# Altium PCB AMC_Single_uBACKPLANE.PcbDoc (part 1 of 2)
Units mm, origin at the board's own origin, x right, y up, seen from the top; angles counter-clockwise.
Board outline 54.63 x 82.6 mm, 4 copper layers (TOP, GND, PWR, BTM), stack 1.618 mm thick; 29 components, 100 nets, 344 pads, 209 vias.
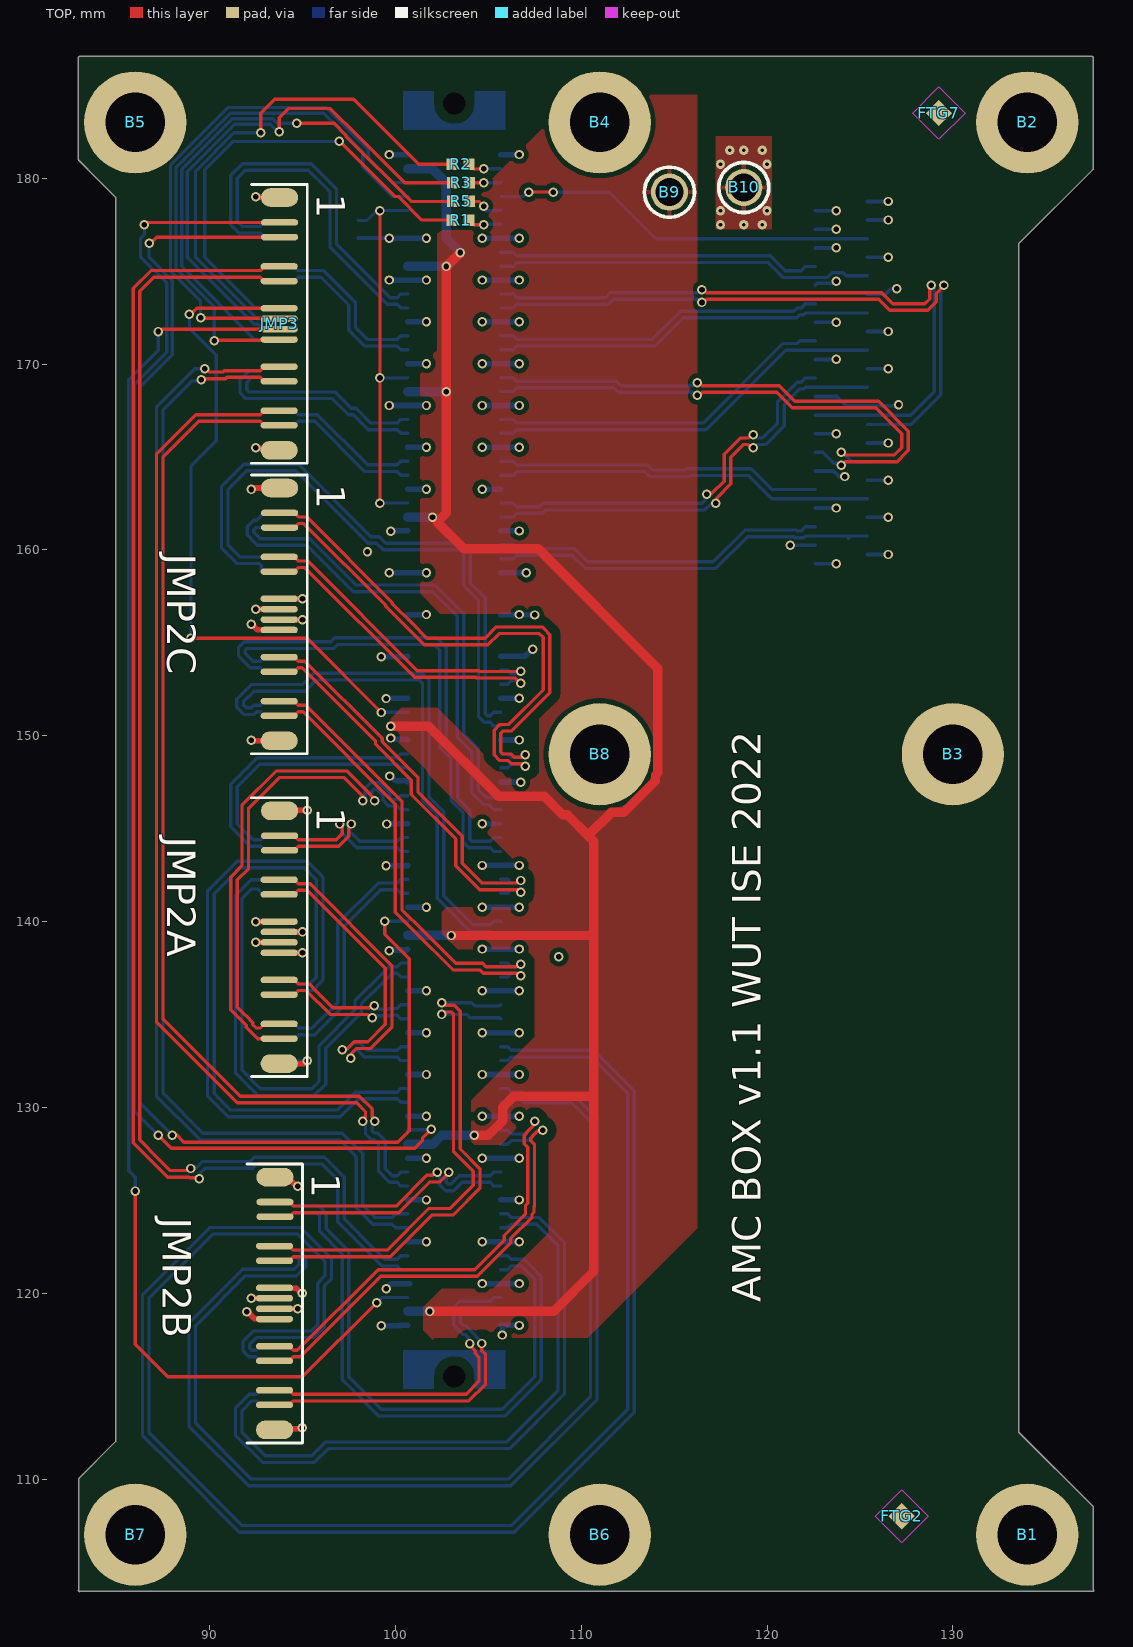
[diagram p0: TOP view]
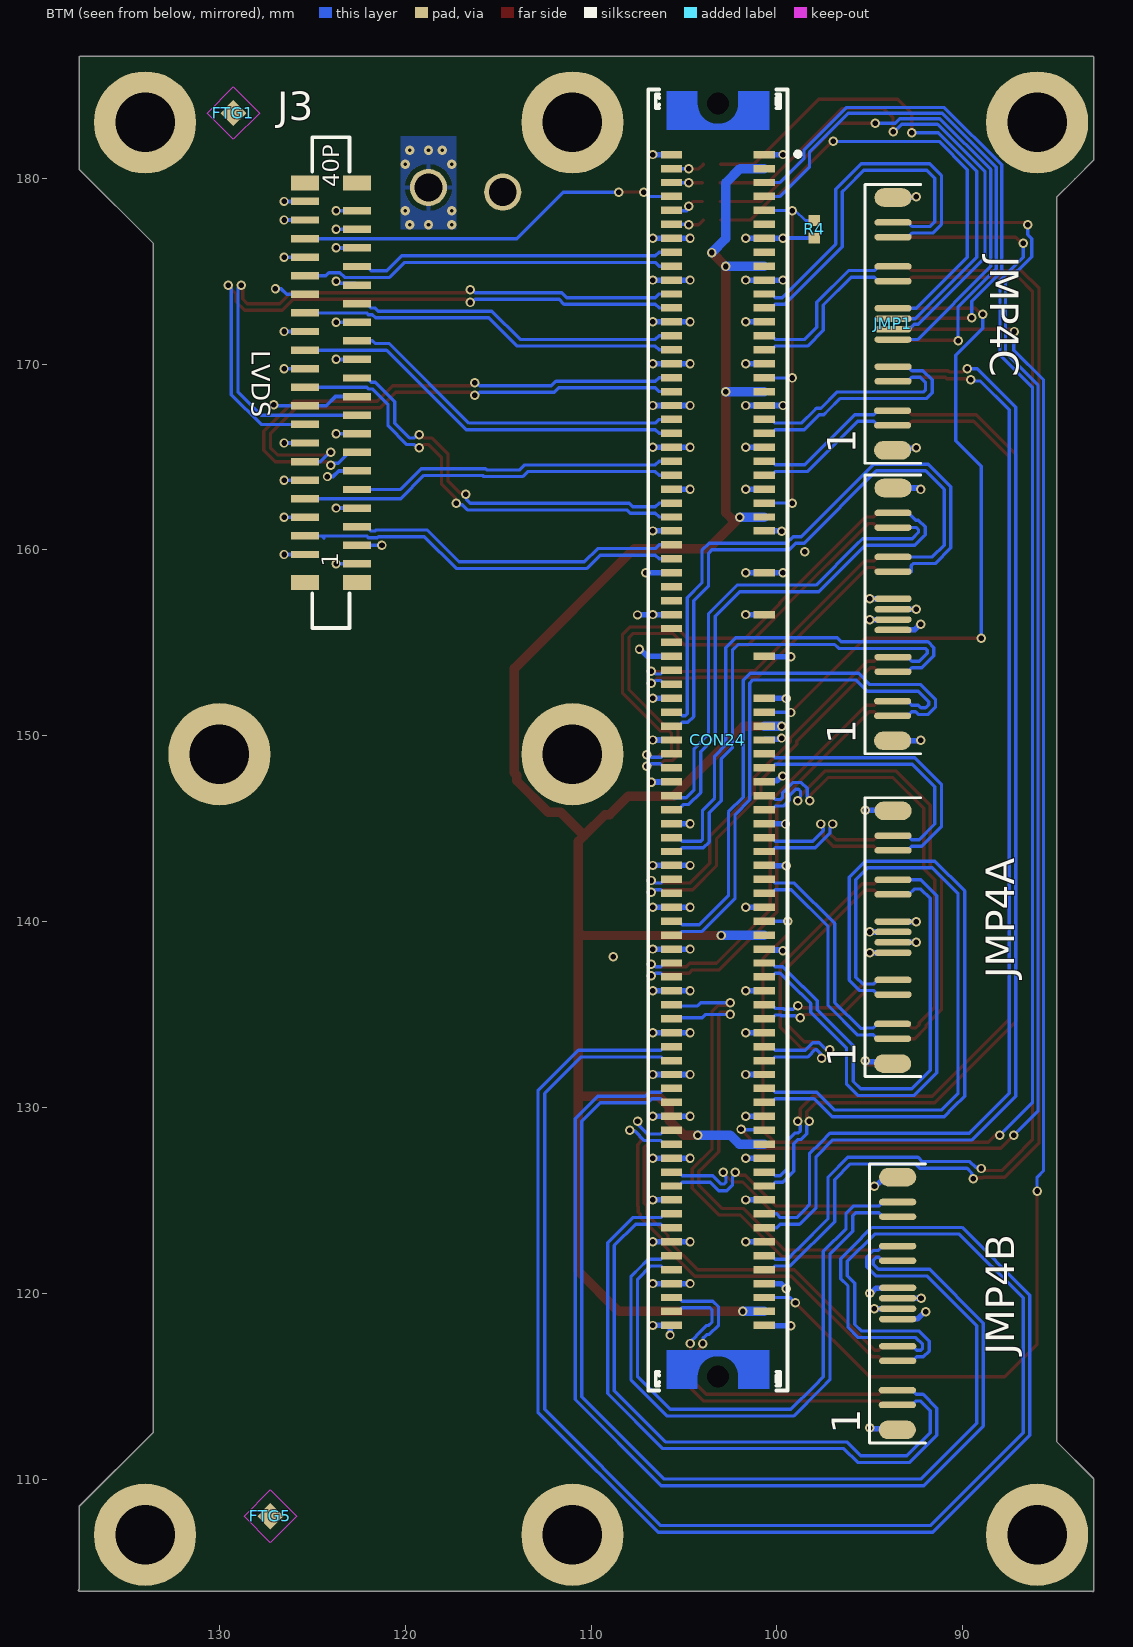
[diagram p1: BTM view, seen from below]
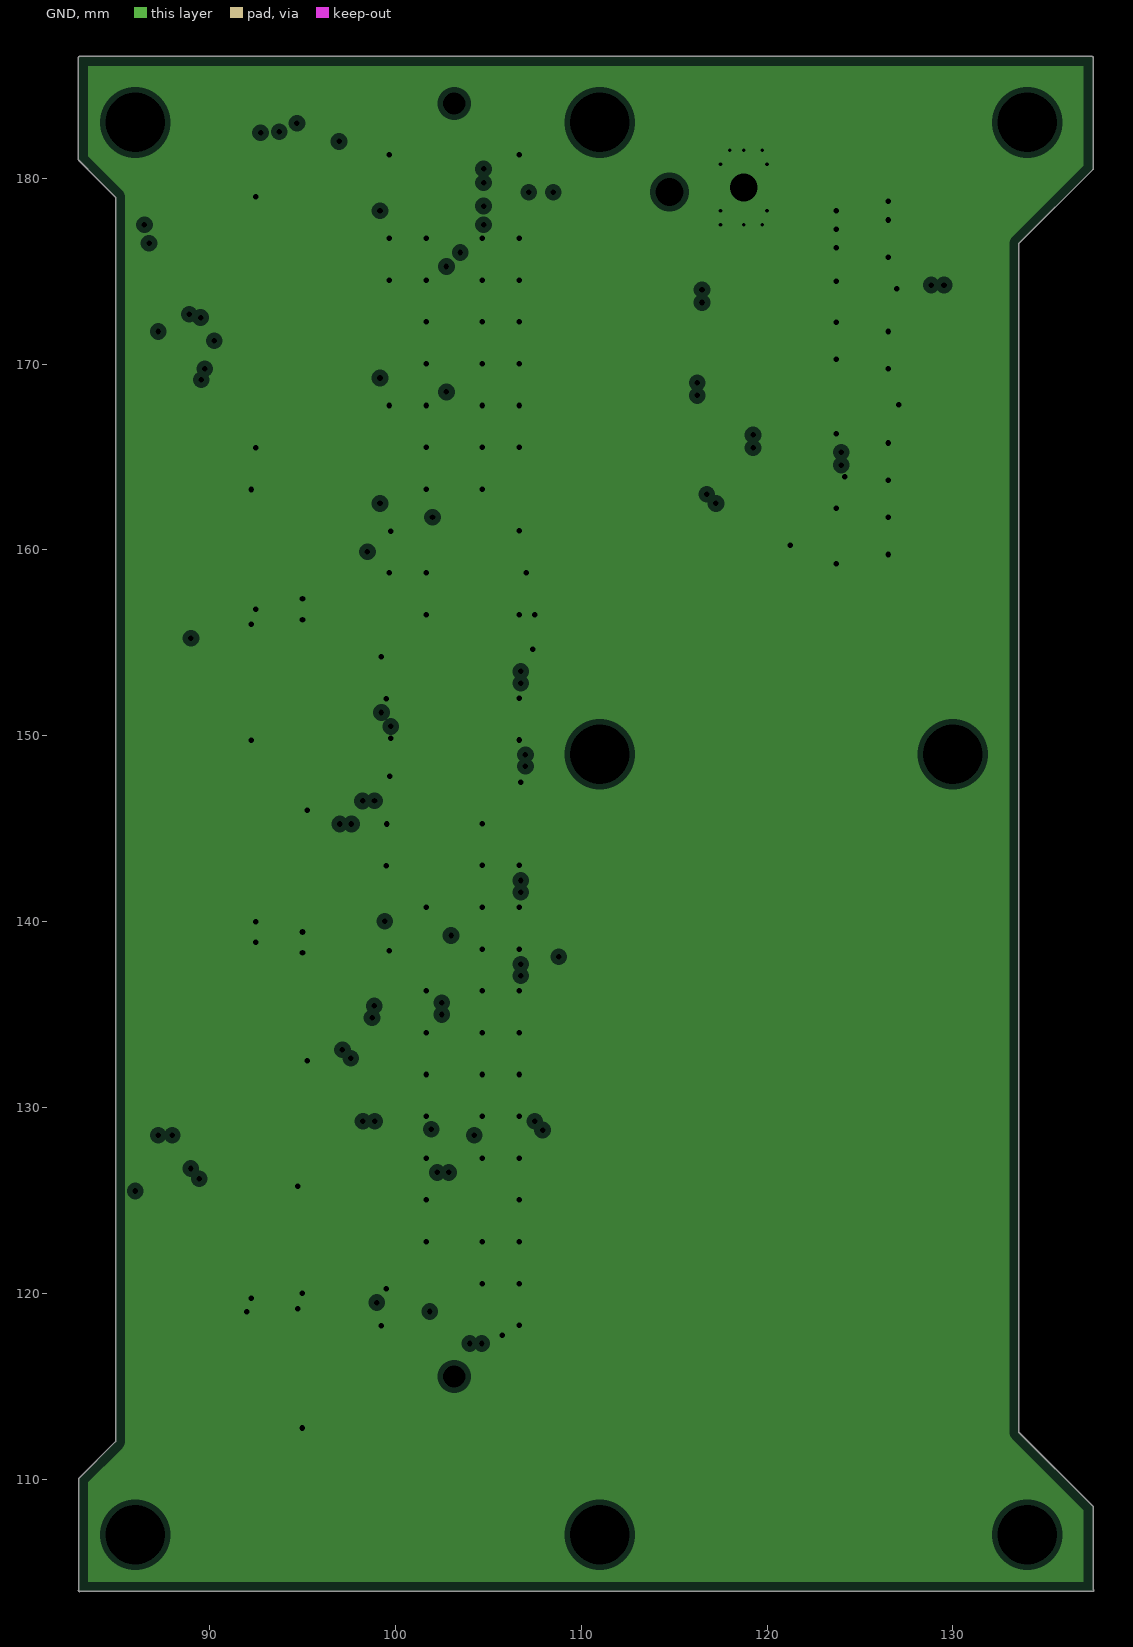
[diagram p2: GND, clearances drawn from the general rule]
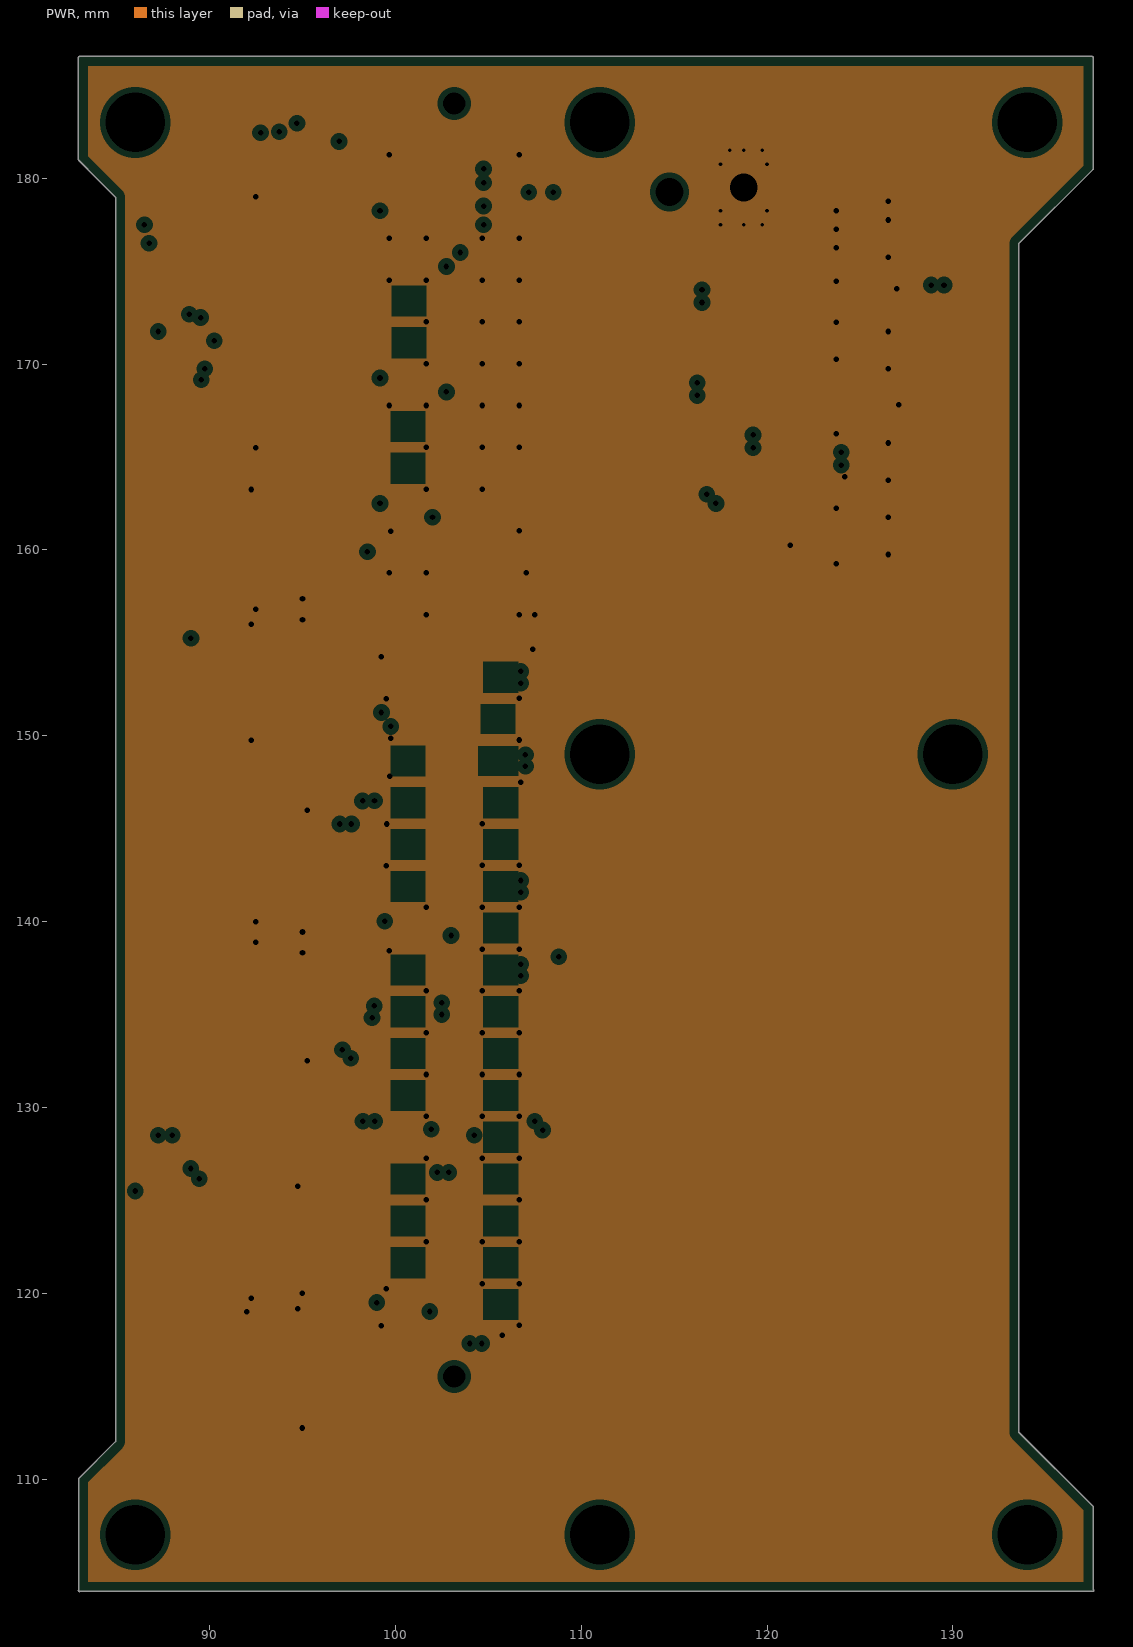
[diagram p3: PWR, clearances drawn from the general rule]
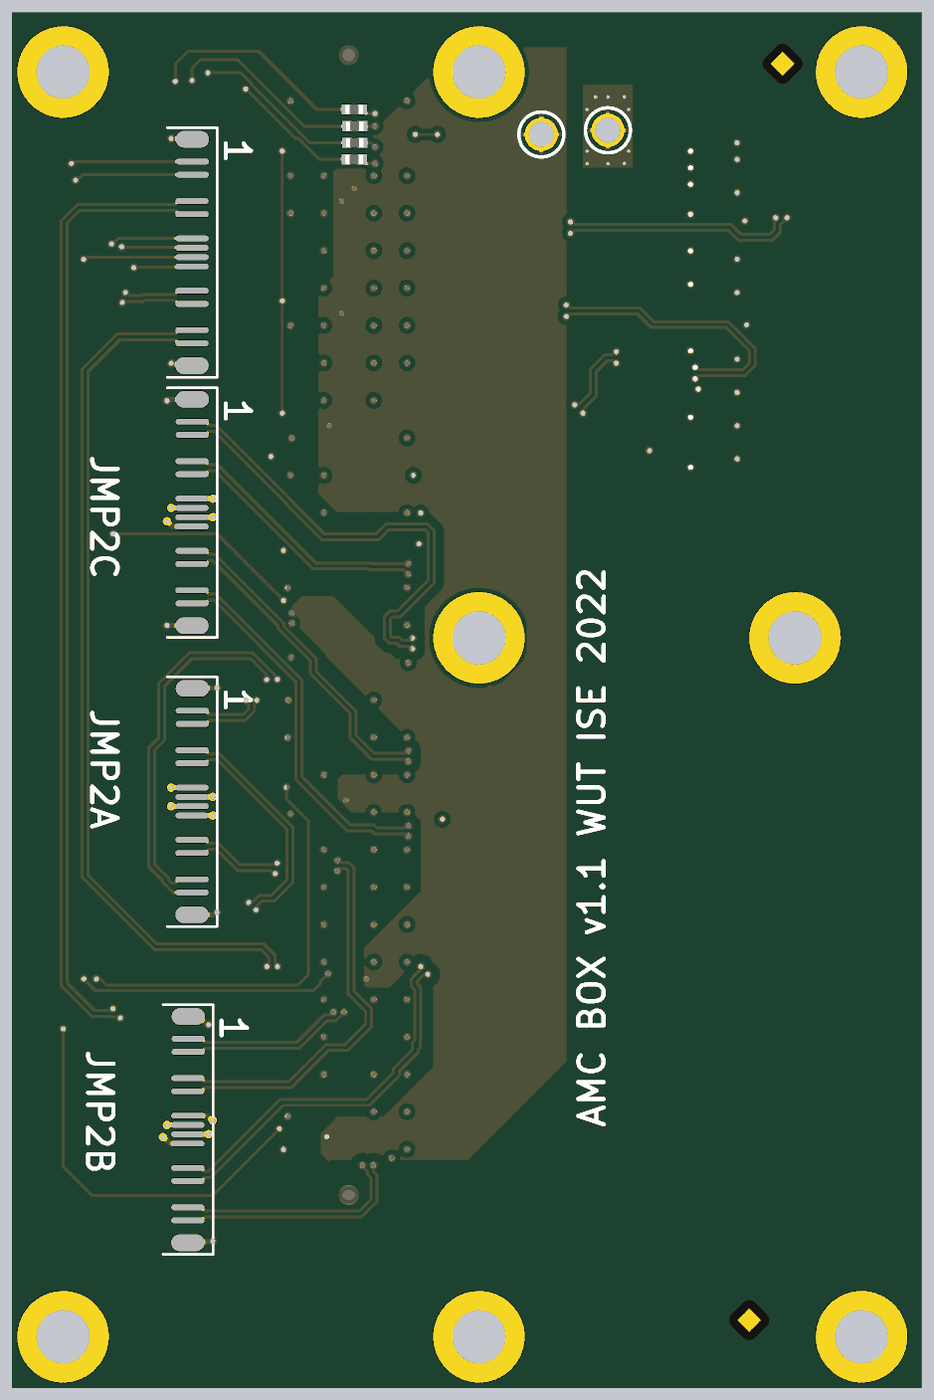
[diagram p5: 3D render of the assembled board from above, using the file's embedded part models]

## Layer stack, top to bottom
Top Solder: solder mask 0.012, Solder Resist, Dk 3.5
TOP: signal copper 0.053
Dielectric1: core 0.18, FR4 IT180-A / S1000-2 0.135mm 18u/18u, Dk 4.5
GND: plane copper 0.036, net GND
Dielectric2: prepreg 1.08, FR-4, Dk 4.5
PWR: plane copper 0.036, net GND
Dielectric3: core 0.18, FR4 IT180-A / S1000-2 0.135mm 18u/18u, Dk 4.5
BTM: signal copper 0.053
Bottom Solder: solder mask 0.012, Solder Resist, Dk 3.5

## Board outline
83.032,103.961 cw(c83,104) 82.961,104.032 82.961,110.011 cw(c83.011,110.011) 82.976,110.047 82.975,110.047 84.95,112.021 84.95,178.979 83.965,179.964 cw(c84,180) 83.964,179.964 cw(c84,180) 83.964,179.965 83.965,179.964 82.964,180.964 82.965,180.964 cw(c83,181) 82.95,181 82.95,186.5 cw(c83,186.5) 83,186.55 137.5,186.55 cw(c137.5,186.5) 137.55,186.5 137.55,180.5 cw(c137.5,180.5) 137.535,180.464 137.536,180.464 133.55,176.479 133.55,112.521 137.536,108.536 137.535,108.536 cw(c137.5,108.5) 137.55,108.5 137.55,104.064 137.568,104.047 137.567,104.047 cw(c137.532,104.011) 137.582,104.011 cw(c137.532,104.011) 137.532,103.961

## Design rules (kind name [scope] priority, off if disabled: settings)
AcuteAngle [All] p1: minimum=5.00000000000000E+0001 checktracksonly=FALSE
Clearance Pads_v_pads [InPadClass('All pads') vs InPadClass('All pads')] p1: gap=0.025 ignorepadtopadclearanceinfootprint=FALSE except(0: Arc-Hole Track-Hole SMDPad-Hole THPad-Hole Via-Hole Fill-Hole Poly-Hole Region-Hole Text-Hole)
Clearance poly_vs_impedance [InNetClass('SE') or InNetClass('DE') vs inpoly] p2: gap=0.5 ignorepadtopadclearanceinfootprint=FALSE except(0: Arc-Hole Track-Hole SMDPad-Hole THPad-Hole Via-Hole Fill-Hole Poly-Hole Region-Hole Text-Hole)
Clearance DE&SE_in_room [(InNetClass('DE') OR InNetClass('SE')) and iswire and (WithinRoom('QSFPA') OR WithinRoom('QSFPB') OR WithinRoom('SFP0_AFC') OR WithinRoom('SFP0_ACC') OR WithinRoom('SFP1_AFC') OR WithinRoom('SFP1_ACC') OR WithinRoom('CLK') OR WithinRoom('ETH_CON') OR WithinRoom('IO') OR WithinRoom('USB_UART') OR WithinRoom('U_RPTR_1') OR WithinRoom('U_RPTR_2') OR WithinRoom('U_RPTR_3'))] p3: gap=0.15 ignorepadtopadclearanceinfootprint=FALSE except(0: Arc-Hole Track-Hole SMDPad-Hole THPad-Hole Via-Hole Fill-Hole Poly-Hole Region-Hole Text-Hole)
Clearance DE_vs_DE [InNetClass('DE') and (IsWire) vs InNetClass('DE') and (IsWire)] p4: gap=0.4 ignorepadtopadclearanceinfootprint=FALSE except(0: Arc-Hole Track-Hole SMDPad-Hole THPad-Hole Via-Hole Fill-Hole Poly-Hole Region-Hole Text-Hole)
Clearance DE_vs_12V [(InDifferentialPairClass('All Differential Pairs')) vs InNet('P12V')] p5: gap=0.4 ignorepadtopadclearanceinfootprint=FALSE except(0: Arc-Hole Track-Hole SMDPad-Hole THPad-Hole Via-Hole Fill-Hole Poly-Hole Region-Hole Text-Hole)
Clearance DE_vs_rest [InNetClass('DE') and iswire vs iswire and (not InNetClass('DE'))] p6: gap=0.4 ignorepadtopadclearanceinfootprint=FALSE except(0: Arc-Hole Track-Hole SMDPad-Hole THPad-Hole Via-Hole Fill-Hole Poly-Hole Region-Hole Text-Hole)
Clearance Clearance_ICs [WithinRoom('CPU') OR WithinRoom('ETH_PHY') vs NOT InPoly] p7: gap=0.12 ignorepadtopadclearanceinfootprint=FALSE except(0: Arc-Hole Track-Hole SMDPad-Hole THPad-Hole Via-Hole Fill-Hole Poly-Hole Region-Hole Text-Hole)
Clearance SE_vs_rest [InNetClass('SE') and iswire vs iswire or inpoly] p8: gap=0.4 ignorepadtopadclearanceinfootprint=FALSE except(0: Arc-Hole Track-Hole SMDPad-Hole THPad-Hole Via-Hole Fill-Hole Poly-Hole Region-Hole Text-Hole)
Clearance P12V_Clerance [(InNet('ACC_P12V') or InNet('AFC_P12V') or InNet('P12V'))] p9: gap=0.25 ignorepadtopadclearanceinfootprint=FALSE except(0: Arc-Hole Track-Hole SMDPad-Hole THPad-Hole Via-Hole Fill-Hole Poly-Hole Region-Hole Text-Hole)
Clearance poly_vs_con [InComponent('CON21') vs inpoly] p10: gap=0.3 ignorepadtopadclearanceinfootprint=FALSE except(0: Arc-Hole Track-Hole SMDPad-Hole THPad-Hole Via-Hole Fill-Hole Poly-Hole Region-Hole Text-Hole)
Clearance poly_vs_power_poly [InPoly AND (InNet('P3V3') OR InNet('P12V') OR InNet('QSFP_P3V3') OR InNet('SFP_P3V3')) vs InPoly] p11: gap=0.4 ignorepadtopadclearanceinfootprint=FALSE except(0: Arc-Hole Track-Hole SMDPad-Hole THPad-Hole Via-Hole Fill-Hole Poly-Hole Region-Hole Text-Hole)
Clearance poly_vs_rest [All vs inpoly] p12: gap=0.254 ignorepadtopadclearanceinfootprint=FALSE except(0: Arc-Hole Track-Hole SMDPad-Hole THPad-Hole Via-Hole Fill-Hole Poly-Hole Region-Hole Text-Hole)
Clearance [All] p13: gap=0.12 ignorepadtopadclearanceinfootprint=FALSE except(0: Arc-Hole Track-Hole SMDPad-Hole THPad-Hole Via-Hole Fill-Hole Poly-Hole Region-Hole Text-Hole)
ComponentClearance [All] p1: gap=0 collisioncheckmode=3 verticalgap=0 showdistances=FALSE
DiffPairsRouting [All] p1: maxlimit=0.203 minlimit=0.178 mostfreqgap=0.178 toplayer_minwidth=0.178 toplayer_maxwidth=0.178 toplayer_prefwidth=0.178 bottomlayer_minwidth=0.178 bottomlayer_maxwidth=0.178 bottomlayer_prefwidth=0.178 maxuncoupledlength=12.7
Height [All] p1: minheight=0 maxheight=30 prefheight=25.4
HoleSize [All] p1: absolutevalues=TRUE maxlimit=10 minlimit=0.3 maxpercent=80.000 minpercent=20.000
HoleToHoleClearance [All] p1: gap=0.2 allowstackedmicrovias=FALSE
MinimumAnnularRing [All] p1: minimumring=0.1
MinimumSolderMaskSliver [All] p1: minsoldermaskwidth=0.051
PlaneClearance V_SE [InNetClass('SE')] p1: clearance=0.3
PlaneClearance V_DE [InNetClass('DE')] p2: clearance=0.31
PlaneClearance REST_Clearance [All] p3: clearance=0.3
PlaneConnect PlaneConnect_pad [InPadClass('All pads')] p1: planeconnectstyle=Relief reliefexpansion=0.2 reliefentries=4 reliefconductorwidth=0.5 reliefairgap=0.2
PlaneConnect [All] p2: planeconnectstyle=Direct reliefexpansion=0.508 reliefentries=4 reliefconductorwidth=0.254 reliefairgap=0.254
PolygonConnect PolygonConnect_Vias [IsVIa] p1: connectstyle=Direct reliefconductorwidth=0.254 reliefentries=4 polygonreliefangle="90 Angle" airgapwidth=0.254
PolygonConnect [All] p2: connectstyle=Relief reliefconductorwidth=0.25 reliefentries=4 polygonreliefangle="90 Angle" airgapwidth=0.254
RoomDefinition U_QSFP_JumperC [InComponentClass('U_QSFP_JumperC')] p1: confinementstyle=ConfineIn formatcopy=TRUE lockcomponents=FALSE outline 138.699,136.61 155.699,136.61 155.699,154.61 138.699,154.61
RoomDefinition U_QSFP_JumperB [InComponentClass('U_QSFP_JumperB')] p2: confinementstyle=ConfineIn formatcopy=TRUE lockcomponents=FALSE outline 138.699,119.86 155.699,119.86 155.699,137.86 138.699,137.86
RoomDefinition U_QSFP_JumperA [InComponentClass('U_QSFP_JumperA')] p3: confinementstyle=ConfineIn formatcopy=TRUE lockcomponents=FALSE outline 138.699,102.861 155.699,102.861 155.699,120.86 138.699,120.86
RoomDefinition AMC_BOX_Backplane [InComponentClass('AMC_BOX_Backplane')] p4: confinementstyle=ConfineIn formatcopy=TRUE lockcomponents=FALSE outline 137.5,186.55 80,186.55 80,103.5 137.5,103.5
RoomDefinition AFC [InComponentClass('AFC')] p5: confinementstyle=ConfineIn formatcopy=TRUE lockcomponents=FALSE outline 92,111.5 110,111.5 110,106 92,106
RoutingVias [All] p1: holewidth=0.3 width=0.5 viastyle="Through Hole" minholewidth=0.3 minwidth=0.5 maxholewidth=2 maxwidth=2
SilkToSilkClearance [All] p1: silktosilkclearance=0.025
SilkToSolderMaskClearance SilkscreenOverComponentPads [IsPad] p1: minsilkscreentomaskgap=0.025 clearancetoexposedcopper=TRUE
SolderMaskExpansion [All] p1: expansion=0.051 istentingtop=FALSE
ViasUnderSMD [All] p1: allowed=FALSE
Width POWER_WIDTH [InNetClass('POWER')] p1: maxlimit=10 minlimit=0.2 preferedwidth=0.2 minimp=50.000000 maximp=50.000000 favimp=50.000000
Width SE [InNetClass('SE')] p2: maxlimit=0.13 minlimit=0.13 preferedwidth=0.13 minimp=50.000000 maximp=50.000000 favimp=50.000000
Width DE100 [(InDifferentialPairClass('All Differential Pairs'))] p3: maxlimit=0.11 minlimit=0.11 preferedwidth=0.11 minimp=50.000000 maximp=50.000000 favimp=50.000000
Width [All] p4: maxlimit=10 minlimit=0.152 preferedwidth=0.2
20 further rules are at their usual default settings.

## Classes and differential pairs
channel class QSFP_Jumper: U_QSFP_JumperA U_QSFP_JumperB U_QSFP_JumperC
component class U_QSFP_JumperC: JMP2C JMP4C
component class U_QSFP_JumperB: JMP2B JMP4B
component class U_QSFP_JumperA: JMP2A JMP4A
component class AMC_BOX_Backplane: B3 B4 B5 B6 B7 B8 B9 B10 CON1 CON12 CON28 FTG1 FTG2 FTG5 FTG7 J3 JMP1 JMP3 R1 R2 R3 R4 R5
net class SFP: FCLKA_N FCLKA_P QRX1A_N QRX1A_P QRX1B_N QRX1B_P QRX1C_N QRX1C_P QRX2A_N QRX2A_P QRX2B_N QRX2B_P QRX2C_N QRX2C_P QRX3A_N QRX3A_P QRX3B_N QRX3B_P QRX3C_N QRX3C_P QRX4A_N QRX4A_P QRX4B_N QRX4B_P QRX4C_N QRX4C_P QTX1A_N QTX1A_P QTX1B_N QTX1B_P QTX1C_N QTX1C_P QTX2A_N QTX2A_P QTX2B_N QTX2B_P QTX2C_N QTX2C_P QTX3A_N QTX3A_P QTX3B_N QTX3B_P QTX3C_N QTX3C_P QTX4A_N QTX4A_P QTX4B_N QTX4B_P QTX4C_N QTX4C_P RX0_N RX0_P RX1_N RX1_P TCLKA_N TCLKA_P TCLKB_N TCLKB_P TX0_N TX0_P TX1_N TX1_P
net class AMC_CTRL: ENABLE# PS0# PS1# SCL_L SDA_L
component class AFC: B1 B2 CON24
net class DE: BA4_CLK_N FCLKA_N FCLKA_P QRX1A_N QRX1A_P QRX1B_N QRX1B_P QRX1C_N QRX1C_P QRX2A_N QRX2A_P QRX2B_N QRX2B_P QRX2C_N QRX2C_P QRX3A_N QRX3A_P QRX3B_N QRX3B_P QRX3C_N QRX3C_P QRX4A_N QRX4A_P QRX4B_N QRX4B_P QRX4C_N QRX4C_P QTX1A_N QTX1A_P QTX1B_N QTX1B_P QTX1C_N QTX1C_P QTX2A_N QTX2A_P QTX2B_N QTX2B_P QTX2C_N QTX2C_P QTX3A_N QTX3A_P QTX3B_N QTX3B_P QTX3C_N QTX3C_P QTX4A_N QTX4A_P QTX4B_N QTX4B_P QTX4C_N QTX4C_P RX0_N RX0_P RX1_N RX1_P TCLKA_N TCLKA_P TCLKB_N TCLKB_P TX0_N TX0_P TX1_N TX1_P
differential pair QTX4C: +QTX4C_P -QTX4C_N
differential pair QTX4B: +QTX4B_P -QTX4B_N
differential pair QTX4A: +QTX4A_P -QTX4A_N
differential pair QTX3C: +QTX3C_P -QTX3C_N
differential pair QTX3B: +QTX3B_P -QTX3B_N
differential pair QTX3A: +QTX3A_P -QTX3A_N
differential pair QTX2C: +QTX2C_P -QTX2C_N
differential pair QTX2B: +QTX2B_P -QTX2B_N
differential pair QTX2A: +QTX2A_P -QTX2A_N
differential pair QTX1C: +QTX1C_P -QTX1C_N
differential pair QTX1B: +QTX1B_P -QTX1B_N
differential pair QTX1A: +QTX1A_P -QTX1A_N
differential pair QRX4C: +QRX4C_P -QRX4C_N
differential pair QRX4B: +QRX4B_P -QRX4B_N
differential pair QRX4A: +QRX4A_P -QRX4A_N
differential pair QRX3C: +QRX3C_P -QRX3C_N
differential pair QRX3B: +QRX3B_P -QRX3B_N
differential pair QRX3A: +QRX3A_P -QRX3A_N
differential pair QRX2C: +QRX2C_P -QRX2C_N
differential pair QRX2B: +QRX2B_P -QRX2B_N
differential pair QRX2A: +QRX2A_P -QRX2A_N
differential pair QRX1C: +QRX1C_P -QRX1C_N
differential pair QRX1B: +QRX1B_P -QRX1B_N
differential pair QRX1A: +QRX1A_P -QRX1A_N
differential pair TX20: +TX20_P -TX20_N
differential pair TX19: +TX19_P -TX19_N
differential pair TX18: +TX18_P -TX18_N
differential pair TX17: +TX17_P -TX17_N
differential pair TX1: +TX1_P -TX1_N
differential pair TX0: +TX0_P -TX0_N
differential pair TCLKD: +TCLKD_P -TCLKD_N
differential pair TCLKC: +TCLKC_P -TCLKC_N
differential pair TCLKB: +TCLKB_P -TCLKB_N
differential pair TCLKA: +TCLKA_P -TCLKA_N
differential pair RX20: +RX20_P -RX20_N
differential pair RX19: +RX19_P -RX19_N
differential pair RX18: +RX18_P -RX18_N
differential pair RX17: +RX17_P -RX17_N
differential pair RX1: +RX1_P -RX1_N
differential pair RX0: +RX0_P -RX0_N
differential pair FCLKA: +FCLKA_P -FCLKA_N

## Components (designator, comment, footprint, x,y, rotation, side; value= is the part's Value field where it differs from the comment)
B1 "Plated Hole" MTG320_550 134,107 r0 top locked
B2 "Plated Hole" MTG320_550 134,183 r0 top locked
B3 "Plated Hole" MTG320_550 130,149 r0 top locked
B4 "Plated Hole" MTG320_550 111,183 r0 top locked
B5 "Plated Hole" MTG320_550 86,183 r0 top locked
B6 "Plated Hole" MTG320_550 111,107 r0 top locked
B7 "Plated Hole" MTG320_550 86,107 r0 top locked
B8 "Plated Hole" MTG320_550 111,149 r0 top locked
B9 "Plated Hole" c200h150 114.75,179.25 r90 top
B10 "Plated Hole" c200h150 118.75,179.5 r90 top
CON24 "SAMTEC_MTCA-085-02-S-DV-SMT-K-TR" SAMTEC_MTCA-085-02-S-DV-SMT-K-TR 103.174,149.77 r90 bottom locked
FTG1 "Use only in PCB" FIDUCIAL_TOP_S100-200 129.25,183.5 r90 bottom
FTG2 "Use only in PCB" FIDUCIAL_TOP_S100-200 127.25,108 r90 top
FTG5 "Use only in PCB" FIDUCIAL_TOP_S100-200 127.25,108 r90 bottom
FTG7 "Use only in PCB" FIDUCIAL_TOP_S100-200 129.25,183.5 r90 top
J3 "687340124422" 687340124422 124,169 r90 bottom locked
JMP1 "3M_Twinax_SL8801/12-10DA5-00" 3M_Twinax_SL8801/12-10DA5-00 93.761,172.16 r90 bottom
JMP2A "3M_Twinax_SL8801/12-10DA5-00" 3M_Twinax_SL8801/12-10DA5-00 93.761,139.16 r270 top (schematic designator JMP2)
JMP2B "3M_Twinax_SL8801/12-10DA5-00" 3M_Twinax_SL8801/12-10DA5-00 93.511,119.45 r270 top (schematic designator JMP2)
JMP2C "3M_Twinax_SL8801/12-10DA5-00" 3M_Twinax_SL8801/12-10DA5-00 93.761,156.53 r270 top (schematic designator JMP2)
JMP3 "3M_Twinax_SL8801/12-10DA5-00" 3M_Twinax_SL8801/12-10DA5-00 93.761,172.16 r270 top
JMP4A "3M_Twinax_SL8801/12-10DA5-00" 3M_Twinax_SL8801/12-10DA5-00 93.761,139.16 r90 bottom (schematic designator JMP4)
JMP4B "3M_Twinax_SL8801/12-10DA5-00" 3M_Twinax_SL8801/12-10DA5-00 93.511,119.45 r90 bottom (schematic designator JMP4)
JMP4C "3M_Twinax_SL8801/12-10DA5-00" 3M_Twinax_SL8801/12-10DA5-00 93.761,156.53 r90 bottom (schematic designator JMP4)
R1 "0" RESC1005X40N 103.5,177.75 r0 top
R2 "0" RESC1005X40N 103.5,180.75 r0 top
R3 "0" RESC1005X40N 103.53,179.75 r0 top
R4 "0" RESC1005X40N 98,177.25 r270 bottom
R5 "0" RESC1005X40N 103.53,178.75 r0 top

## Footprints (in the part's own frame and the unit in brackets; to place one, negate y for a bottom-side part, rotate by r counter-clockwise, add the part's x,y. Pads: shape width x height; smd on the part's side, far side on the other; paste and mask are expansions set on the pad)
3M_Twinax_SL8801/12-10DA5-00 [mm]
  oval 1x2 smd: 1(-6.8,0.011) 14(6.8,-0.011)
  oval 0.35x2 smd: 2(-5.46,0.011) 3(-4.67,0.011) 4(-3.09,-0.011) 5(-2.3,-0.011) 6(-0.84,-0.011) 7(-0.28,-0.011) 8(0.28,-0.011) 9(0.84,-0.011) 10(2.3,-0.011) 11(3.09,-0.011) 12(4.67,-0.011) 13(5.46,-0.011)
  silkscreen extent -7.5,-1.5 7.5,1.5
687340124422 [mm] "0.50 mm SMT ZIF Vertical, 40p"
  rect 0.4x1.5 smd: 1(-9.75,-1.4) 2(-9.25,1.4) 3(-8.75,-1.4) 4(-8.25,1.4) 5(-7.75,-1.4) 6(-7.25,1.4) 7(-6.75,-1.4) 8(-6.25,1.4) 9(-5.75,-1.4) 10(-5.25,1.4) 11(-4.75,-1.4) 12(-4.25,1.4) 13(-3.75,-1.4) 14(-3.25,1.4) 15(-2.75,-1.4) 16(-2.25,1.4) 17(-1.75,-1.4) 18(-1.25,1.4) 19(-0.75,-1.4) 20(-0.25,1.4) 21(0.25,-1.4) 22(0.75,1.4) 23(1.25,-1.4) 24(1.75,1.4) 25(2.25,-1.4) 26(2.75,1.4) 27(3.25,-1.4) 28(3.75,1.4) 29(4.25,-1.4) 30(4.75,1.4) 31(5.25,-1.4) 32(5.75,1.4) 33(6.25,-1.4) 34(6.75,1.4) 35(7.25,-1.4) 36(7.75,1.4) 37(8.25,-1.4) 38(8.75,1.4) 39(9.25,-1.4) 40(9.75,1.4)
  rect 0.8x1.5 smd: ""(-10.75,-1.4) ""(-10.75,1.4) ""(10.75,-1.4) ""(10.75,1.4)
  silkscreen extent -13.2,-1 13.2,1, body extent -13.2,-1.75 13.2,1.75, height 4.92
c200h150 [mm] "Plated Through Hole: Hole Dia.=1.5mm Pad Dia.=2.0mm, IPC-7251 Level C"
  round 2 hole 1.5: 1(0,0)
  silkscreen extent -1.35,-1.35 1.35,1.35
FIDUCIAL_TOP_S100-200 [mm] "Square Fiducial Target, Top Layer, 1.0mm, Top Solder 2.0mm, Keepout =2.0mm"
  rect 1x1 smd rot 45 paste-0.51 mask+0.5: 1(0,0)
  TOP keep-out region: 1.414,0 0,-1.414 -1.414,0 0,1.414
MTG320_550 [mm] "Plated Through Hole: Hole Dia.=3.2mm Pad Dia.=5.5mm"
  round 5.5 hole 3.2: 1(0,0)
RESC1005X40N [mm] "Chip Resistor, EIA 0402, Metric 1005, Body 1.0x0.5mm, IPC Medium Density"
  rect 0.58x0.62 smd: 1(-0.47,0) 2(0.47,0)
  body extent -0.52,-0.27 0.53,0.28, height 0.4
SAMTEC_MTCA-085-02-S-DV-SMT-K-TR [mm] "170 Contacts, Pitch 0.75mm, Micro TCA Connector"
  rect 0.4x1.15 smd: 1(31.5,-2.5) 2(30.75,-2.5) 3(30,-2.5) 4(29.25,-2.5) 5(28.5,-2.5) 6(27.75,-2.5) 7(27,-2.5) 8(26.25,-2.5) 9(25.5,-2.5) 10(24.75,-2.5) 11(24,-2.5) 12(23.25,-2.5) 13(22.5,-2.5) 14(21.75,-2.5) 15(21,-2.5) 16(20.25,-2.5) 17(19.5,-2.5) 18(18.75,-2.5) 19(18,-2.5) 20(17.25,-2.5) 21(16.5,-2.5) 22(15.75,-2.5) 23(15,-2.5) 24(14.25,-2.5) 25(13.5,-2.5) 26(12.75,-2.5) 27(12,-2.5) 28(11.25,-2.5) 31(9,-2.5) 34(6.75,-2.5) 37(4.5,-2.5) 40(2.25,-2.5) 41(1.5,-2.5) 42(0.75,-2.5) 43(0,-2.5) 44(-0.75,-2.5) 45(-1.5,-2.5) 46(-2.25,-2.5) 47(-3,-2.5) 48(-3.75,-2.5) 49(-4.5,-2.5) 50(-5.25,-2.5) 51(-6,-2.5) 52(-6.75,-2.5) 53(-7.5,-2.5) 54(-8.25,-2.5) 55(-9,-2.5) 56(-9.75,-2.5) 57(-10.5,-2.5) 58(-11.25,-2.5) 59(-12,-2.5) 60(-12.75,-2.5) 61(-13.5,-2.5) 62(-14.25,-2.5) 63(-15,-2.5) 64(-15.75,-2.5) 65(-16.5,-2.5) 66(-17.25,-2.5) 67(-18,-2.5) 68(-18.75,-2.5) 69(-19.5,-2.5) 70(-20.25,-2.5) 71(-21,-2.5) 72(-21.75,-2.5) 73(-22.5,-2.5) 74(-23.25,-2.5) 75(-24,-2.5) 76(-24.75,-2.5) 77(-25.5,-2.5) 78(-26.25,-2.5) 79(-27,-2.5) 80(-27.75,-2.5) 81(-28.5,-2.5) 82(-29.25,-2.5) 83(-30,-2.5) 84(-30.75,-2.5) 85(-31.5,-2.5) 86(-31.5,2.5) 87(-30.75,2.5) 88(-30,2.5) 89(-29.25,2.5) 90(-28.5,2.5) 91(-27.75,2.5) 92(-27,2.5) 93(-26.25,2.5) 94(-25.5,2.5) 95(-24.75,2.5) 96(-24,2.5) 97(-23.25,2.5) 98(-22.5,2.5) 99(-21.75,2.5) 100(-21,2.5) 101(-20.25,2.5) 102(-19.5,2.5) 103(-18.75,2.5) 104(-18,2.5) 105(-17.25,2.5) 106(-16.5,2.5) 107(-15.75,2.5) 108(-15,2.5) 109(-14.25,2.5) 110(-13.5,2.5) 111(-12.75,2.5) 112(-12,2.5) 113(-11.25,2.5) 114(-10.5,2.5) 115(-9.75,2.5) 116(-9,2.5) 117(-8.25,2.5) 118(-7.5,2.5) 119(-6.75,2.5) 120(-6,2.5) 121(-5.25,2.5) 122(-4.5,2.5) 123(-3.75,2.5) 124(-3,2.5) 125(-2.25,2.5) 126(-1.5,2.5) 127(-0.75,2.5) 128(0,2.5) 129(0.75,2.5) 130(1.5,2.5) 131(2.25,2.5) 132(3,2.5) 133(3.75,2.5) 134(4.5,2.5) 135(5.25,2.5) 136(6,2.5) 137(6.75,2.5) 138(7.5,2.5) 139(8.25,2.5) 140(9,2.5) 141(9.75,2.5) 142(10.5,2.5) 143(11.25,2.5) 144(12,2.5) 145(12.75,2.5) 146(13.5,2.5) 147(14.25,2.5) 148(15,2.5) 149(15.75,2.5) 150(16.5,2.5) 151(17.25,2.5) 152(18,2.5) 153(18.75,2.5) 154(19.5,2.5) 155(20.25,2.5) 156(21,2.5) 157(21.75,2.5) 158(22.5,2.5) 159(23.25,2.5) 160(24,2.5) 161(24.75,2.5) 162(25.5,2.5) 163(26.25,2.5) 164(27,2.5) 165(27.75,2.5) 166(28.5,2.5) 167(29.25,2.5) 168(30,2.5) 169(30.75,2.5) 170(31.5,2.5)
  round 0.5 hole 1.2 unplated mask+0.35: 171(-34.25,0) 172(34.25,0)
  TOP region: -34.9,-2.75 -34.9,-1.1 -34.25,-1.1 -33.7,-0.953 -33.297,-0.55 -33.15,0 -33.297,0.55 -33.7,0.953 -34.25,1.1 -34.25,1.1 -34.9,1.1 -34.9,2.75 -32.85,2.75 -32.85,-2.75
  TOP region: 34.9,2.75 34.9,1.1 34.25,1.1 33.7,0.953 33.297,0.55 33.15,0 33.297,-0.55 33.7,-0.953 34.25,-1.1 34.25,-1.1 34.9,-1.1 34.9,-2.75 32.85,-2.75 32.85,2.75
  silkscreen extent -35,-4.42 35,3.75, body extent -35,-3.75 35,3.75, height 12.85

## Part data
B1 B2 B3 B4 B5 B6 B7 B8: library part PLATED_HOLE3.2_PAD5.5, "Single Terminal Socket", Author="CERN DEM JMW", Component Type="Standard (No BOM)", ComponentHeight=0mm, CreateDate=01.10.2012, Family="Plated Hole", HelpURL=Undefined, LatestRevisionDate=01.10.2012, Mounted=No, PackageDescription="Plated Through Hole: Hole Dia.=3.2mm Pad Dia.=5.5mm", Part Description="Plated Through Hole: Hole Dia.=3.2mm Pad Dia.=5.5mm", Part Number=PLATED_HOLE3.2_PAD5.5, Pin Count=1, Sense=No, SMD=No, Socket=No, Status=None
B9 B10: library part PLATED_HOLE1.5_PAD2.0, "Single Terminal Socket", Author="CERN DEM JLC", Component Type="Standard (No BOM)", ComponentHeight=0mm, CreateDate=30.10.2008, Family="Plated Hole", HelpURL=Undefined, LatestRevisionDate=30.10.2008, Mounted=No, PackageDescription="Plated Through Hole: Hole Dia.=1.5mm Pad Dia.=2.0mm, IPC-7251 Level C", Part Description="Plated Through Hole: Hole Dia.=1.5mm Pad Dia.=2.0mm, IPC-7251 Level C", Part Number=PLATED_HOLE1.5_PAD2.0, Pin Count=1, Sense=No, SMD=No, Socket=No, Status=None
CON24: "170 Poles,  Micro TCA (Telecom Computing Architecture) Edge Card Socket", Manufacturer=SAMTEC, Manufacturer Part Number=MTCA-085-02-S-DV-SMT-K-TR, Author="CERN DEM JLC", Component Type=Standard, ComponentHeight=12.85mm, CreateDate=2012-08-15, HelpURL=\\cern.ch\dfs\Applications\Altium\Datasheets\SAMTEC_MTCA-085-02-S-DV-SMT-K-TR.pdf, LatestRevisionDate=2012-08-15, Mounted=Yes, Part Description="170 Poles, Pitch 0.75mm, Micro TCA (Telecom Computing Architecture) Edge Card Socket", Part Number=SAMTEC_MTCA-085-02-S-DV-SMT-K-TR, Pin Count=170, SMD=Yes, Socket=No, Status=None, Table=SAMTEC
FTG1 FTG2 FTG5 FTG7: library part FIDUCIAL_TARGET_S100-200, "Fiducial Target", Author="CERN DEM JLC", Component Type="Standard (No BOM)", ComponentHeight=0mm, CreateDate=2010-02-09, Family=Fiducial, LatestRevisionDate=2012-04-04, Mounted=No, PackageDescription="Square Fiducial Target, Top Layer, 1.0mm, Top Solder 2.0mm, Keepout =2.0mm", Part Description="Square Fiducial Target, Top Layer, 1.0mm, Top Solder 2.0mm, Keepout =2.0mm", Part Number=FIDUCIAL_TARGET_S100-200, Pin Count=1, SMD=Yes, Socket=No, Status=None, Table=Pads
J3: "0.50 mm SMT ZIF Vertical WR-FPC, 40 pins", ComponentLink1Description=Manufacturer, ComponentLink1URL=http://www.we-online.de, ComponentLink2Description=Datasheet, ComponentLink2URL=http://katalog.we-online.com/em/datasheet/6873xx124422.pdf, Part Number=687340124422, Pin Number=40, Pitch="0.5 mm", Published Date="April 2017", Publisher="Wurth Elektronik"
JMP1 JMP2A JMP2B JMP2C JMP3 JMP4A JMP4B JMP4C: library part CBL_TWINAX_3M_4pairs_SB, "Flat Ribbon Cable Silver 8 (4 Pair) Conductors 0.093\" (2.37mm) Between Pairs Flat Twin Axial 500.0' (152.40m)"
R1 R2 R3 R4 R5: library part R0402_0R_JUMPER, "Resistor", Case=0402, Manufacturer=GENERIC, Manufacturer1 ComponentHeight=0.4mm, Manufacturer1 Example="YAGEO PHYCOMP", Manufacturer1 Part Number=232270591001L, Author="CERN DEM JLC", Component Type=Standard, CreateDate=2007-12-03, HelpURL=\\cern.ch\dfs\Applications\Altium\Datasheets\R0402_Phycomp_RC0402.pdf, LatestRevisionDate=2012-10-17, Manufacturer Part Number=R0402_0R_JUMPER, Mounted=Yes, Part Description="1A (0.05R Max DC Resistance) Zero Ohm Jumper", Part Number=R0402_0R_JUMPER, Pin Count=2, SMD=Yes, Socket=No, Status="Not recommended", Table="Resistors SMD"

## Via types
v1: diameter 0.5, hole 0.3, TOP to BTM, tented both sides, 99 vias
v2: diameter 0.51, hole 0.3, TOP to BTM, tented both sides, 88 vias
v3: diameter 0.51, hole 0.3, TOP to BTM, 12 vias
v4: diameter 0.5, hole 0.2, TOP to BTM, tented both sides, 10 vias

## Nets (pads, with @x,y where several pads share a name; then routed paths per layer and width w, separated by ;. In a path a pad name is that pad's centre, name@x,y a point inside that pad or via, vN(x,y) a via of type N, cw(c..) or ccw(c..) an arc to the next point about the centre after c; other vN are vias at no path point)
AMC_MP3V3: CON24.4 JMP3.9 | length 29.7
  TOP w0.178: v2(90.25,171.25) 90.287,171.287 93.717,171.287 JMP3.9@93.75,171.32
  BTM w0.178: v2(90.25,171.25) 90.25,173.079 88.202,175.127 88.202,180.597 91.108,183.503 96.153,183.503 98.242,181.414 98.242,180.611 99.832,179.02 CON24.4@100.674,179.02
AMC_P12V: B9.1 CON24.2 CON24.9 CON24.18 CON24.27 CON24.42 CON24.57 CON24.72 CON24.84 | length 123.2
  TOP w0.508: v2(99.75,150.5) 101.8,150.5 105.55,146.75 108,146.75 109,145.75 109.25,145.75 110.375,144.625 ; v2(101.849,119.02) 108.52,119.02 110.68,121.18 110.68,130.75 ; v2(103,139.25) 110.5,139.25 110.68,139.43 ; v2(103.5,176) v2(102.75,175.25) v2(102.75,168.5) 102.75,162 102.25,161.5 103.677,160.073 107.677,160.073 114.124,153.626 114.124,148 114,147.876 114,147.582 112.294,145.876 111.626,145.876 110.375,144.625 ; v2(104.25,128.5) 105,128.5 105.787,129.287 105.787,130.008 106.385,130.606 110.536,130.606 110.68,130.75 ; 110.375,144.625 110.68,144.32 110.68,139.43 ; 110.68,130.75 110.68,139.43
  BTM w0.508: v2(99.75,150.5) 100.654,150.5 CON24.42@100.674,150.52 ; CON24.84@100.674,119.02 v2(101.849,119.02) ; CON24.72@100.674,128.02 102.02,128.02 102.5,128.5 v2(104.25,128.5) ; CON24.57@100.674,139.27 102.98,139.27 v2(103,139.25) ; CON24.27@100.674,161.77 100.694,161.75 v2(102,161.75) ; CON24.18@100.674,168.52 100.694,168.5 v2(102.75,168.5) ; CON24.9@100.674,175.27 100.694,175.25 v2(102.75,175.25) ; CON24.2@100.674,180.52 101.98,180.52 102.75,179.75 102.75,176.75 v2(103.5,176)
ENABLE#: CON24.41 JMP3.6 | length 36.9
  TOP w0.178: v2(88.914,172.674) 89,172.674 89.326,173 JMP3.6@93.75,173 ; v2(89,155.25) 95.25,155.25 v2(99.25,151.25)
  BTM w0.178: v2(88.914,172.674) 88.922,172.666 88.922,171.922 90.369,170.475 90.369,165.869 89,164.5 v2(89,155.25) ; v2(99.25,151.25) 99.5,151.25 99.52,151.27 CON24.41@100.674,151.27
FCLKA_N: CON24.81 JMP3.4 | length 74.1
  TOP w0.178: v2(89.444,126.159) 89.382,126.221 88.922,126.221 88.894,126.249 87.749,126.249 86.749,127.249 85.894,128.103 85.894,174.074 86.853,175.033 92.735,175.033 92.952,175.25 JMP3.4@93.75,175.25
  BTM w0.178: v2(89.444,126.159) 89.508,126.222 89.508,126.47 89.769,126.731 92.325,126.731 92.552,126.959 96.041,126.959 96.894,126.106 96.894,123.853 99.28,121.467 100.102,121.467 100.299,121.27 CON24.81@100.674,121.27
FCLKA_P: CON24.80 JMP3.5 | length 72.7
  TOP w0.178: v2(88.999,126.712) 88.894,126.608 88.894,126.604 87.896,126.604 87.251,127.249 86.25,128.25 86.25,173.927 87,174.677 92.735,174.677 92.952,174.46 JMP3.5@93.75,174.46
  BTM w0.178: v2(88.999,126.712) 89.062,126.776 89.31,126.776 89.621,127.087 92.177,127.087 92.405,127.315 96.188,127.315 97.25,126.253 97.25,124 98.874,122.376 99,122.25 99.427,121.823 100.102,121.823 100.299,122.02 CON24.80@100.674,122.02
GA0: CON24.5 CON24.17 CON24.26 R4.1 | length 21.5
  TOP w0.152: v2(99.174,162.5) v2(99.174,169.25) v2(99.174,178.25)
  BTM w0.152: R4.1@98,177.72 98.47,177.72 v2@99.02,178.27 ; v2(99.174,162.5) 99.194,162.52 CON24.26@100.674,162.52 ; v2(99.174,169.25) 100.654,169.25 CON24.17@100.674,169.27 ; v2@99.174,178.27 CON24.5@100.674,178.27
GND: B10.1 CON24.1 CON24.7 CON24.10 CON24.13 CON24.16 CON24.19 CON24.22 CON24.25 CON24.28 CON24.31 CON24.34 CON24.37 CON24.40 CON24.43 CON24.46 CON24.49 CON24.52 CON24.55 CON24.58 CON24.61 CON24.64 CON24.67 CON24.70 CON24.73 CON24.76 CON24.79 CON24.82 CON24.85 CON24.86 CON24.89 CON24.92 CON24.95 CON24.98 CON24.101 CON24.104 CON24.107 CON24.110 CON24.113 CON24.116 CON24.119 CON24.122 CON24.125 CON24.128 CON24.131 CON24.134 CON24.137 CON24.140 CON24.143 CON24.146 CON24.149 CON24.152 CON24.155 CON24.158 CON24.161 CON24.164 CON24.170 J3.1 J3.2 J3.3 J3.6 J3.7 J3.10 J3.11 J3.14 J3.15 J3.18 J3.19 J3.22 J3.23 J3.26 J3.27 J3.30 J3.31 J3.34 J3.35 J3.37 J3.38 J3.39 J3.40 JMP1.1 JMP1.14 JMP2A.1 JMP2A.6 JMP2A.7 JMP2A.8 JMP2A.9 JMP2A.14 JMP2B.1 JMP2B.6 JMP2B.7 JMP2B.8 JMP2B.9 JMP2B.14 JMP2C.1 JMP2C.6 JMP2C.7 JMP2C.8 JMP2C.9 JMP2C.14 JMP3.1 JMP3.14 JMP4A.1 JMP4A.6 JMP4A.7 JMP4A.8 JMP4A.9 JMP4A.14 JMP4B.1 JMP4B.6 JMP4B.7 JMP4B.8 JMP4B.9 JMP4B.14 JMP4C.1 JMP4C.6 JMP4C.7 JMP4C.8 JMP4C.9 JMP4C.14 R4.2 | length 168.7
  TOP w0.3: v3(92,119) 92.057,119 92.437,118.62 93.49,118.62 JMP2B.9@93.5,118.61 ; v3(92.245,119.73) JMP2B.7@93.5,119.73 ; v2(92.25,149.75) 92.26,149.74 93.74,149.74 JMP2C.14@93.75,149.73 ; v3(92.25,156) 92.291,156 92.592,155.7 93.74,155.7 JMP2C.9@93.75,155.69 ; v2(92.25,163.25) 92.307,163.25 92.387,163.33 JMP2C.1@93.772,163.33 ; v3(92.495,138.88) JMP2A.8@93.75,138.88 ; v3(92.495,140) JMP2A.6@93.75,140 ; v3(92.495,156.81) JMP2C.7@93.75,156.81 ; v2(92.496,179) 92.516,178.98 93.752,178.98 JMP3.1@93.772,178.96 ; v2(92.5,165.5) 92.54,165.46 93.65,165.46 JMP3.14@93.75,165.36 ; JMP2B.14@93.5,112.65 93.56,112.71 94.96,112.71 v2(95,112.75) ; JMP2B.8@93.5,119.17 v3(94.755,119.17) ; JMP2B.6@93.5,120.29 93.51,120.28 94.663,120.28 94.943,120 v3(95,120) ; JMP2B.1@93.522,126.25 94.193,126.25 94.693,125.75 v2(94.75,125.75) ; JMP2A.14@93.75,132.36 95.11,132.36 v2(95.25,132.5) ; JMP2A.9@93.75,138.32 v3(95.005,138.32) ; JMP2A.7@93.75,139.44 v3(95.005,139.44) ; JMP2C.8@93.75,156.25 v3(95.005,156.25) ; JMP2C.6@93.75,157.37 v3(95.005,157.37) ; JMP2A.1@93.772,145.96 93.792,145.98 95.23,145.98 v2(95.25,146)
  BTM w0.2: R4.2@98,176.78 99.663,176.78 v1(99.673,176.77) ; CON24.122@105.309,145.27 CON24.122@105.674,145.27 ; v2(121.25,160.25) J3.3@122.6,160.25 ; J3.1@122.6,159.25 v1(123.72,159.25) ; J3.7@122.6,162.25 123.495,162.25 v1(123.72,162.25) ; J3.11@122.6,164.25 123.575,164.25 123.879,163.947 v1(124.184,163.947) ; J3.15@122.6,166.25 123.495,166.25 v1(123.72,166.25) ; J3.19@122.6,168.25 123.75,168.25 124.25,167.75 J3.18@125.4,167.75 127.023,167.75 v1(127.08,167.807) ; J3.23@122.6,170.25 123.495,170.25 v1(123.72,170.25) ; J3.27@122.6,172.25 123.495,172.25 v1(123.72,172.25) ; J3.31@122.6,174.25 122.7,174.35 123.53,174.35 123.639,174.459 v1(123.72,174.459) ; J3.35@122.6,176.25 123.495,176.25 v1(123.72,176.25) ; J3.37@122.6,177.25 123.495,177.25 v1(123.72,177.25) ; J3.39@122.6,178.25 123.495,178.25 v1(123.72,178.25) ; J3.2@125.4,159.75 126.295,159.75 v1(126.52,159.75) ; J3.6@125.4,161.75 126.295,161.75 v1(126.52,161.75) ; J3.10@125.4,163.75 126.295,163.75 v1(126.52,163.75) ; J3.14@125.4,165.75 126.295,165.75 v1(126.52,165.75) ; J3.22@125.4,169.75 126.295,169.75 v1(126.52,169.75) ; J3.26@125.4,171.75 126.295,171.75 v1(126.52,171.75) ; J3.30@125.4,173.75 126.375,173.75 126.679,174.053 v1(126.984,174.053) ; J3.34@125.4,175.75 126.295,175.75 v1(126.52,175.75) ; J3.38@125.4,177.75 126.295,177.75 v1(126.52,177.75) ; J3.40@125.4,178.75 126.295,178.75 v1(126.52,178.75)
  BTM w0.3: v3(92,119) 92.057,119 92.437,118.62 93.49,118.62 JMP4B.6@93.5,118.61 ; v3(92.245,119.73) JMP4B.8@93.5,119.73 ; v2(92.25,149.75) 92.26,149.74 93.762,149.74 JMP4C.1@93.772,149.73 ; v3(92.25,156) 92.291,156 92.592,155.7 93.74,155.7 JMP4C.6@93.75,155.69 ; v2(92.25,163.25) 92.307,163.25 92.387,163.33 JMP4C.14@93.75,163.33 ; v3(92.495,138.88) JMP4A.7@93.75,138.88 ; v3(92.495,140) JMP4A.9@93.75,140 ; v3(92.495,156.81) JMP4C.8@93.75,156.81 ; v2(92.496,179) 92.516,178.98 93.73,178.98 JMP1.14@93.75,178.96 ; v2(92.5,165.5) 92.54,165.46 93.672,165.46 JMP1.1@93.772,165.36 ; JMP4B.7@93.5,119.17 v3(94.755,119.17) ; JMP4B.9@93.5,120.29 93.51,120.28 94.663,120.28 94.943,120 v3(95,120) ; JMP4B.14@93.5,126.25 94.189,126.25 94.689,125.75 v2(94.75,125.75) ; JMP4B.1@93.522,112.65 93.582,112.71 94.96,112.71 v2(95,112.75) ; JMP4A.6@93.75,138.32 v3(95.005,138.32) ; JMP4A.8@93.75,139.44 v3(95.005,139.44) ; JMP4A.14@93.75,145.96 93.77,145.98 95.23,145.98 v2(95.25,146) ; JMP4C.7@93.75,156.25 v3(95.005,156.25) ; JMP4C.9@93.75,157.37 v3(95.005,157.37) ; JMP4A.1@93.772,132.36 93.872,132.46 95.21,132.46 v2(95.25,132.5) ; v1(99.25,118.25) 99.26,118.26 100.249,118.26 100.259,118.27 CON24.85@100.674,118.27 ; v1(99.25,154.25) 99.26,154.26 100.664,154.26 CON24.37@100.674,154.27 ; v2(99.5,120.25) 99.77,120.52 CON24.82@100.674,120.52 ; v1(99.5,143) 99.51,143.01 100.664,143.01 CON24.52@100.674,143.02 ; v1(99.5,152) 99.51,152.01 100.664,152.01 CON24.40@100.674,152.02 ; v1(99.541,145.25) 99.561,145.27 CON24.49@100.674,145.27 ; v1(99.673,158.77) v1(101.674,158.77) ; v1(99.673,167.77) v1(101.674,167.77) ; v1(99.673,174.52) v1(101.674,174.52) ; v1(99.673,176.77) v1(101.674,176.77) ; v1(99.673,181.27) CON24.1@100.674,181.27 ; v1(99.676,138.426) 99.73,138.426 99.774,138.47 100.624,138.47 CON24.58@100.674,138.52 ; v1(99.696,147.828) 99.75,147.828 100.008,147.57 100.624,147.57 CON24.46@100.674,147.52 ; v1(99.748,149.875) 99.802,149.875 99.857,149.82 100.624,149.82 CON24.43@100.674,149.77 ; v2(99.75,161) 99.77,161.02 CON24.28@100.674,161.02 ; 99.769,120.5 CON24.82@100.77,120.5 ; CON24.79@100.674,122.77 v1(101.674,122.77) ; CON24.76@100.674,125.02 v1(101.674,125.02) ; CON24.73@100.674,127.27 v1(101.674,127.27) ; CON24.70@100.674,129.52 v1(101.674,129.52) ; CON24.67@100.674,131.77 v1(101.674,131.77) ; CON24.64@100.674,134.02 v1(101.674,134.02) ; CON24.61@100.674,136.27 v1(101.674,136.27) ; CON24.55@100.674,140.77 v1(101.674,140.77) ; CON24.34@100.674,156.52 v1(101.674,156.52) ; CON24.25@100.674,163.27 v1(101.674,163.27) ; CON24.22@100.674,165.52 v1(101.674,165.52) ; CON24.16@100.674,170.02 v1(101.674,170.02) ; CON24.13@100.674,172.27 v1(101.674,172.27) ; v1(104.673,120.52) v1(106.674,120.52) ; v1(104.673,122.77) v1(106.674,122.77) ; v1(104.673,127.27) v1(106.674,127.27) ; v1(104.673,129.52) v1(106.674,129.52) ; v1(104.673,131.77) v1(106.674,131.77) ; v1(104.673,134.02) v1(106.674,134.02) ; v1(104.673,136.27) v1(106.674,136.27) ; v1(104.673,138.52) v1(106.674,138.52) ; v1(104.673,140.77) v1(106.674,140.77) ; v1(104.673,143.02) v1(106.674,143.02) ; v1(104.673,145.27) CON24.122@105.309,145.27 ; v1(104.673,163.27) CON24.146@105.674,163.27 ; v1(104.673,165.52) v1(106.674,165.52) ; v1(104.673,167.77) v1(106.674,167.77) ; v1(104.673,170.02) v1(106.674,170.02) ; v1(104.673,172.27) v1(106.674,172.27) ; v1(104.673,174.52) v1(106.674,174.52) ; v1(104.673,176.77) v1(106.674,176.77) ; CON24.86@105.674,118.27 v1(106.674,118.27) ; CON24.95@105.674,125.02 v1(106.674,125.02) ; CON24.125@105.674,147.52 105.684,147.51 106.74,147.51 v1(106.75,147.5) ; CON24.128@105.674,149.77 v1(106.674,149.77) ; CON24.131@105.674,152.02 v1(106.674,152.02) ; CON24.134@105.674,154.27 106.966,154.27 107.344,154.648 v1(107.398,154.648) ; CON24.137@105.674,156.52 v1(106.674,156.52) 106.684,156.51 107.49,156.51 v1(107.5,156.5) ; CON24.140@105.674,158.77 v1(107.05,158.77) ; CON24.143@105.674,161.02 v1(106.674,161.02) ; CON24.170@105.674,181.27 v1(106.674,181.27) ; CON24.86@105.7,118.27 105.75,118.22 v1(105.75,117.75)
  other v4: 117.5,177.5 118.75,177.5 119.75,177.5 117.5,178.25 120,178.25 117.5,180.75 120,180.75 118,181.5 118.75,181.5 119.75,181.5
NetJMP1_6: JMP1.6 R5.1 | length 29.7
  TOP w0.178: v2(94.703,182.953) 96.703,182.953 97.342,182.314 97.342,182.26 100.852,178.75 R5.1@103.06,178.75
  BTM w0.178: JMP1.6@93.75,171.32 92.43,171.32 88.5,175.25 88.5,180.473 91.232,183.205 93.398,183.205 93.639,182.964 94.692,182.964 v2(94.703,182.953)
NetJMP1_7: JMP1.7 R3.1 | length 29.3
  TOP w0.178: v2(93.75,182.5) 93.75,183.25 94.25,183.75 96.5,183.75 98,182.25 100.5,179.75 R3.1@103.06,179.75
  BTM w0.178: JMP1.7@93.75,171.88 92.878,171.88 92.616,172.142 92.396,172.142 88.798,175.74 88.798,180.35 91.355,182.907 93.275,182.907 93.682,182.5 v2(93.75,182.5)
NetJMP1_8: JMP1.8 R2.1 | length 28
  TOP w0.178: v2(92.75,182.443) 92.75,183.5 93.5,184.25 97.75,184.25 101.25,180.75 R2.1@103.03,180.75
  BTM w0.178: v2(92.75,182.443) 91.312,182.443 89.25,180.381 89.25,175.75 92.56,172.44 JMP1.8@93.75,172.44
NetJMP1_9: JMP1.9 R1.1 | length 25.5
  TOP w0.178: v2(96.973,181.979) 97.021,181.979 99.98,179.02 100.161,179.02 101.431,177.75 R1.1@103.03,177.75
  BTM w0.178: JMP1.9@93.75,173 92.5,173 89.75,175.75 89.75,180.46 91.27,181.979 v2(96.973,181.979)
PS0#: CON24.83 JMP3.8 | length 79
  TOP w0.178: v2(86,125.5) 86,117.25 87.75,115.5 95,115.5 v2(99,119.5) ; v2(87.238,171.75) 87.328,171.75 87.458,171.88 JMP3.8@93.75,171.88
  BTM w0.178: v2(86,125.5) 86,126.25 85.654,126.596 85.654,169.154 87.25,170.75 87.25,171.738 v2(87.238,171.75) ; v2(99,119.5) 99.27,119.77 CON24.83@100.674,119.77 CON24.83@100.679,119.775
PS1#: CON24.3 JMP3.7 | length 29.1
  TOP w0.178: v2(89.519,172.5) 89.549,172.47 93.72,172.47 JMP3.7@93.75,172.44
  BTM w0.178: v2(89.519,172.5) 89.519,173.388 87.904,175.003 87.904,180.72 90.985,183.801 96.277,183.801 98.539,181.538 98.539,181.063 99.832,179.77 CON24.3@100.674,179.77
QRX1A_N: CON24.48 JMP2A.13 | length 26.4
  TOP w0.178: JMP2A.13@93.75,133.7 92.587,133.7 91.978,134.31 91.978,134.417 91.144,135.25 91.144,142.397 91.749,143.001 91.749,146.249 93.606,148.106 97.397,148.106 98.501,147.001 98.627,146.876 98.627,146.843 98.88,146.59 v2(98.88,146.5)
  BTM w0.178: v2(98.88,146.5) 98.88,146.59 98.73,146.74 98.73,147.022 98.834,147.126 98.992,147.126 99.341,146.777 99.341,146.53 99.653,146.217 100.102,146.217 100.299,146.02 CON24.48@100.674,146.02
QRX1A_P: CON24.47 JMP2A.12 | length 25.1
  TOP w0.178: JMP2A.12@93.75,134.49 92.952,134.49 92.735,134.273 92.518,134.273 92.333,134.457 92.333,134.564 92.001,134.896 91.876,135.022 91.5,135.397 91.5,142.25 92.104,142.854 92.104,146.101 93.753,147.75 97.25,147.75 98.25,146.75 98.25,146.503 v2(98.238,146.491)
  BTM w0.178: v2(98.238,146.491) 98.238,146.581 98.375,146.717 98.375,147.169 98.687,147.481 99.139,147.481 99.697,146.924 99.697,146.677 99.801,146.573 100.102,146.573 100.299,146.77 CON24.47@100.674,146.77
QRX1B_N: CON24.87 JMP2B.13 | length 18.8
  TOP w0.178: JMP2B.13@93.5,113.99 94.298,113.99 94.515,114.207 103.957,114.207 104.856,115.106 104.856,116.707 104.652,116.911 104.652,117.293 v2(104.655,117.296)
  BTM w0.178: v2(104.655,117.296) 104.655,117.378 104.336,117.697 104.336,117.704 103.775,118.265 103.656,118.265 103.495,118.426 103.495,119.113 103.6,119.217 105.102,119.217 105.299,119.02 CON24.87@105.674,119.02
QRX1B_P: CON24.88 JMP2B.12 | length 18.8
  TOP w0.178: JMP2B.12@93.5,114.78 94.298,114.78 94.515,114.563 103.81,114.563 104.5,115.253 104.5,116.56 104.297,116.763 104.297,116.908 104,117.205 v2(104,117.295)
  BTM w0.178: v2(104,117.295) 103.958,117.337 103.958,117.601 103.936,117.601 103.752,117.785 103.634,117.785 103.14,118.279 103.14,119.26 103.452,119.573 105.102,119.573 105.299,119.77 CON24.88@105.674,119.77
QRX1C_N: CON24.111 JMP2C.13 | length 23.6
  TOP w0.178: JMP2C.13@93.75,151.07 94.548,151.07 94.765,151.287 95.033,151.287 100,146.32 100,140.497 100.999,139.499 103.103,137.394 104.551,137.394 104.728,137.217 106.523,137.217 106.66,137.08 v2(106.75,137.08)
  BTM w0.178: CON24.111@105.674,137.02 106.049,137.02 106.246,137.217 106.523,137.217 106.66,137.08 v2(106.75,137.08)
QRX1C_P: CON24.112 JMP2C.12 | length 23.6
  TOP w0.178: JMP2C.12@93.75,151.86 94.548,151.86 94.765,151.643 95.18,151.643 100.356,146.467 100.356,140.644 101.501,139.499 103.25,137.75 104.698,137.75 104.875,137.573 106.523,137.573 106.66,137.71 v2(106.75,137.71)
  BTM w0.178: CON24.112@105.674,137.77 106.049,137.77 106.246,137.573 106.523,137.573 106.66,137.71 v2(106.75,137.71)